# EAGLE board CT_schematic (EAGLE 7.6.0)

Size 100 x 80 mm. Coordinates in mm from the lower left corner, seen from the top.
Outline: 0,0 100,0 100,80 0,80 0,0
Copper layers (1*16): Top 0.035mm / dielectric 1.5mm / Bottom 0.035mm
Design rules "default": minimum track width 10mil, minimum drill 24mil, track to track 8mil, track to pad 8mil, pad to pad 8mil, via to via 8mil, smd to smd 8mil, copper to edge 40mil, drill to drill 8mil, minimum pad ring 10mil, minimum via ring 8mil, stop-mask expansion 4mil, vias tented up to drill 0mil, thermal gap 10mil

## Footprints (pad centres in the part's own frame; a part is rotated, then mirrored left to right if it is on the bottom)
C0603 = smd 0.8 x 0.8: 1 -0.762,0; 2 0.762,0
C0402 = smd 0.5 x 0.5: 1 -0.508,0; 2 0.508,0
C0805 = smd 1.2 x 1.3: 1 -1.016,0; 2 1.016,0
C1210 = smd 1.2 x 2.5: 1 -1.524,0; 2 1.524,0
C1206 = smd 1.3 x 1.6: 1 -1.524,0; 2 1.524,0
EXV-9H = smd 3.505 x 1.676: 1 -2.857,0; 2 2.857,0
L0603 = smd 0.8 x 0.8: 1 -0.762,0; 2 0.762,0
R0603 = smd 0.8 x 0.8: 1 -0.762,0; 2 0.762,0
DR1040 = smd 1.6 x 3.2: 1 -4.458,0; 2 4.458,0
PJ-037B_PACKAGE = drill 3.7 square: 1 12,0 | drill 3.2 square: 2 6,0
UFBGA169 = smd 0.35 x 0.35: A1 -3.9,3.9; A2 -3.25,3.9; A3 -2.6,3.9; A4 -1.95,3.9; A5 -1.3,3.9; A6 -0.65,3.9; A7 0,3.9; A8 0.65,3.9; A9 1.3,3.9; A10 1.95,3.9; A11 2.6,3.9; A12 3.25,3.9; A13 3.9,3.9; B1 -3.9,3.25; B2 -3.25,3.25; B3 -2.6,3.25; B4 -1.95,3.25; B5 -1.3,3.25; B6 -0.65,3.25; B7 0,3.25; B8 0.65,3.25; B9 1.3,3.25; B10 1.95,3.25; B11 2.6,3.25; B12 3.25,3.25; B13 3.9,3.25; C1 -3.9,2.6; C2 -3.25,2.6; C3 -2.6,2.6; C4 -1.95,2.6; C5 -1.3,2.6; C6 -0.65,2.6; C7 0,2.6; C8 0.65,2.6; C9 1.3,2.6; C10 1.95,2.6; C11 2.6,2.6; C12 3.25,2.6; C13 3.9,2.6; D1 -3.9,1.95; D2 -3.25,1.95; D3 -2.6,1.95; D4 -1.95,1.95; D5 -1.3,1.95; D6 -0.65,1.95; D7 0,1.95; D8 0.65,1.95; D9 1.3,1.95; D10 1.95,1.95; D11 2.6,1.95; D12 3.25,1.95; D13 3.9,1.95; E1 -3.9,1.3; E2 -3.25,1.3; E3 -2.6,1.3; E4 -1.95,1.3; E5 -1.3,1.3; E6 -0.65,1.3; E7 0,1.3; E8 0.65,1.3; E9 1.3,1.3; E10 1.95,1.3; E11 2.6,1.3; E12 3.25,1.3; E13 3.9,1.3; F1 -3.9,0.65; F2 -3.25,0.65; F3 -2.6,0.65; F4 -1.95,0.65; F5 -1.3,0.65; F6 -0.65,0.65; F7 0,0.65; F8 0.65,0.65; F9 1.3,0.65; F10 1.95,0.65; F11 2.6,0.65; F12 3.25,0.65; F13 3.9,0.65; G1 -3.9,0; G2 -3.25,0; G3 -2.6,0; G4 -1.95,0; G5 -1.3,0; G6 -0.65,0; G7 0,0; G8 0.65,0; G9 1.3,0; G10 1.95,0; G11 2.6,0; G12 3.25,0; G13 3.9,0; H1 -3.9,-0.65; H2 -3.25,-0.65; H3 -2.6,-0.65; H4 -1.95,-0.65; H5 -1.3,-0.65; H6 -0.65,-0.65; H7 0,-0.65; H8 0.65,-0.65; H9 1.3,-0.65; H10 1.95,-0.65; H11 2.6,-0.65; H12 3.25,-0.65; H13 3.9,-0.65; J1 -3.9,-1.3; J2 -3.25,-1.3; J3 -2.6,-1.3; J4 -1.95,-1.3; J5 -1.3,-1.3; J6 -0.65,-1.3; J7 0,-1.3; J8 0.65,-1.3; J9 1.3,-1.3; J10 1.95,-1.3; J11 2.6,-1.3; J12 3.25,-1.3; J13 3.9,-1.3; K1 -3.9,-1.95; K2 -3.25,-1.95; K3 -2.6,-1.95; K4 -1.95,-1.95; K5 -1.3,-1.95; K6 -0.65,-1.95; K7 0,-1.95; K8 0.65,-1.95; K9 1.3,-1.95; K10 1.95,-1.95; K11 2.6,-1.95; K12 3.25,-1.95; K13 3.9,-1.95; L1 -3.9,-2.6; L2 -3.25,-2.6; L3 -2.6,-2.6; L4 -1.95,-2.6; L5 -1.3,-2.6; L6 -0.65,-2.6; L7 0,-2.6; L8 0.65,-2.6; L9 1.3,-2.6; L10 1.95,-2.6; L11 2.6,-2.6; L12 3.25,-2.6; L13 3.9,-2.6; M1 -3.9,-3.25; M2 -3.25,-3.25; M3 -2.6,-3.25; M4 -1.95,-3.25; M5 -1.3,-3.25; M6 -0.65,-3.25; M7 0,-3.25; M8 0.65,-3.25; M9 1.3,-3.25; M10 1.95,-3.25; M11 2.6,-3.25; M12 3.25,-3.25; M13 3.9,-3.25; N1 -3.9,-3.9; N2 -3.25,-3.9; N3 -2.6,-3.9; N4 -1.95,-3.9; N5 -1.3,-3.9; N6 -0.65,-3.9; N7 0,-3.9; N8 0.65,-3.9; N9 1.3,-3.9; N10 1.95,-3.9; N11 2.6,-3.9; N12 3.25,-3.9; N13 3.9,-3.9
SOT-23-6 = smd 1.1 x 0.6: 1 -1.4,0.95; 2 -1.4,0; 3 -1.4,-0.95; 4 1.4,-0.95; 5 1.4,0; 6 1.4,0.95
QFN-32 = smd 0.6 x 0.3: 1 -2.3,1.75; 2 -2.3,1.25; 3 -2.3,0.75; 4 -2.3,0.25; 5 -2.3,-0.25; 6 -2.3,-0.75; 7 -2.3,-1.25; 8 -2.3,-1.75; 17 2.3,-1.75; 18 2.3,-1.25; 19 2.3,-0.75; 20 2.3,-0.25; 21 2.3,0.25; 22 2.3,0.75; 23 2.3,1.25; 24 2.3,1.75 | smd 0.3 x 0.6: 9 -1.75,-2.3; 10 -1.25,-2.3; 11 -0.75,-2.3; 12 -0.25,-2.3; 13 0.25,-2.3; 14 0.75,-2.3; 15 1.25,-2.3; 16 1.75,-2.3; 25 1.75,2.3; 26 1.25,2.3; 27 0.75,2.3; 28 0.25,2.3; 29 -0.25,2.3; 30 -0.75,2.3; 31 -1.25,2.3; 32 -1.75,2.3 | smd 3.2 x 3.2: EXP 0,0
7498011122R = smd 0.71 x 2.29: 1 -3.545,-3.18; 2 -2.525,-3.18; 3 -1.505,-3.18; 4 -0.485,-3.18; 5 0.535,-3.18; 6 1.555,-3.18; 8 3.595,-3.18; 9 5.635,-3.18; 10 6.655,-3.18; 11 -6.605,-3.18; 12 -5.585,-3.18 | smd 1.4 x 2.54: 13 -8.51,10.2; 14 8.51,10.2 | hole 1.4: -3.5,0; 3.5,0
MOLEX_47219-2001 = smd 0.8 x 1.5: 1 3.2,-2.1; 2 2.1,-2.1; 3 1,-2.1; 4 -0.1,-2.1; 5 -1.2,-2.1; 6 -2.3,-2.1; 7 -3.4,-2.1; 8 -4.5,-2.1 | smd 1.5 x 2.05: G1 6.875,-4.7; G2 6.875,3.6; G3 -6.875,3.6; G4 -6.875,-4.7
USB-A-H = drill 0.914: 1 2.718,3.493; 2 2.718,1.003; 3 2.718,-1.003; 4 2.718,-3.493 | drill 2.311: 5 0,-6.566; 6 0,6.566
SOT143B = smd 1 x 0.7: 1 -0.75,-1 | smd 0.6 x 0.7: 2 0.95,-1; 3 0.95,1; 4 -0.95,1
ABLS-25.000MHZ-B2F-T = smd 5.6 x 2.8: 1 -3.81,0; 2 5.69,0
ASEK = smd 1.4 x 1: 1 -1.1,-0.8; 2 1.1,-0.8; 3 1.1,0.8; 4 -1.1,0.8
ASFL1 = smd 1.7 x 1.5: 1 -1.27,-1.1; 2 1.27,-1.1; 3 1.27,1.1; 4 -1.27,1.1
WSON-8 = smd 0.3 x 0.6: 1 -0.75,0; 2 0.05,0; 3 0.85,0; 4 1.65,0; 5 1.65,3.8; 6 0.85,3.8; 7 0.05,3.8; 8 -0.75,3.8 | smd 3 x 2.6: PAD 0.45,1.9
HTSSOP14 = smd 1.676 x 0.356: 1 -2.8,1.95; 2 -2.8,1.3; 3 -2.8,0.65; 4 -2.8,0; 5 -2.8,-0.65; 6 -2.8,-1.3; 7 -2.8,-1.95; 8 2.8,-1.95; 9 2.8,-1.3; 10 2.8,-0.65; 11 2.8,0; 12 2.8,0.65; 13 2.8,1.3; 14 2.8,1.95 | smd 3 x 5: 15 0,0 | drill 0.4 pad 0.45: P$1 -0.75,1.5; P$2 0.75,1.5; P$3 -0.75,0; P$4 0.8,0; P$5 -0.75,-1.5; P$6 0.9,-1.5
SON-6 = smd 0.55 x 0.3: 1 -0.355,0.5 | smd 0.52 x 0.3: 2 -0.37,0; 3 -0.37,-0.5; 4 0.37,-0.5; 5 0.37,0; 6 0.37,0.5
SW_4-1437565-2 = smd 1.4 x 2.1: 1 -2.23,4.55; 2 -2.23,-4.55; 3 2.23,4.55; 4 2.23,-4.55
LGM67K-G1J2-24-Z = smd 0.8 x 1.4: A -2,0; C 0,0
NC7SZ125M5X = smd 1.3 x 0.7: 1 -1.3,0.95; 2 -1.3,0; 3 -1.3,-0.95; 4 1.3,-0.95; 5 1.3,0.95
DUMMY_PACKAGE_243 = drill 0.3: 1 0,-1; 2 1.5,-1; 3 3,-1

## Placement (x,y rotation side)
C1  1e-06  [C0603]  -59.69,80.01 0 top  (outside the outline)
C2  1e-07  [C0603]  -63.5,80.01 0 top  (outside the outline)
C3  1e-07  [C0603]  -67.31,80.01 0 top  (outside the outline)
C4  1e-07  [C0603]  -71.12,80.01 0 top  (outside the outline)
C5  1e-07  [C0603]  -74.93,80.01 0 top  (outside the outline)
C6  1e-07  [C0603]  -78.74,80.01 0 top  (outside the outline)
C7  1e-07  [C0603]  -82.55,80.01 0 top  (outside the outline)
C8  1e-07  [C0603]  -15.24,85.09 0 top  (outside the outline)
C9  1e-07  [C0603]  -19.05,85.09 0 top  (outside the outline)
C10  1e-07  [C0603]  -22.86,85.09 0 top  (outside the outline)
C11  1e-07  [C0603]  -26.67,85.09 0 top  (outside the outline)
C12  1e-07  [C0603]  -30.48,85.09 0 top  (outside the outline)
C13  1e-07  [C0603]  -34.29,85.09 0 top  (outside the outline)
C14  1e-07  [C0603]  -38.1,85.09 0 top  (outside the outline)
C15  1e-07  [C0603]  -41.91,85.09 0 top  (outside the outline)
C16  1e-07  [C0603]  -45.72,85.09 0 top  (outside the outline)
C17  4.7e-06  [C0603]  -44.45,80.01 0 top  (outside the outline)
C18  1e-08  [C0603]  -49.53,85.09 0 top  (outside the outline)
C19  1e-06  [C0603]  -53.34,85.09 0 top  (outside the outline)
C20  2.2e-06  [C0603]  -48.26,80.01 0 top  (outside the outline)
C21  2.2e-06  [C0603]  -52.07,80.01 0 top  (outside the outline)
C22  1e-11  [C0402]  -81.28,90.17 0 top  (outside the outline)
C23  1e-11  [C0402]  -85.09,90.17 0 top  (outside the outline)
C24  2.2e-08  [C0402]  -73.66,90.17 0 top  (outside the outline)
C25  1e-06  [C0603]  -57.15,85.09 0 top  (outside the outline)
C26  1e-06  [C0603]  -60.96,85.09 0 top  (outside the outline)
C27  4.7e-10  [C0603]  -55.88,80.01 0 top  (outside the outline)
C28  1e-06  [C0603]  -64.77,85.09 0 top  (outside the outline)
C29  1e-07  [C0402]  -15.24,95.25 0 top  (outside the outline)
C30  1e-05  [C0805]  -15.24,69.85 0 top  (outside the outline)
C31  1e-08  [C0402]  -19.05,95.25 0 top  (outside the outline)
C32  1e-08  [C0402]  -22.86,95.25 0 top  (outside the outline)
C33  1e-08  [C0402]  -26.67,95.25 0 top  (outside the outline)
C34  1e-05  [C1210]  -29.21,63.5 0 top  (outside the outline)
C35  1e-05  [C0805]  -20.32,69.85 0 top  (outside the outline)
C36  1e-06  [C0603]  -68.58,85.09 0 top  (outside the outline)
C37  3.3e-09  [C0402]  -77.47,90.17 0 top  (outside the outline)
C38  1e-07  [C0402]  -30.48,95.25 0 top  (outside the outline)
C39  2.2e-05  [C1210]  -35.56,63.5 0 top  (outside the outline)
C40  2.2e-05  [C1210]  -41.91,63.5 0 top  (outside the outline)
C41  1e-05  [C1206]  -60.96,63.5 0 top  (outside the outline)
C42  1e-05  [C1206]  -67.31,63.5 0 top  (outside the outline)
C43  1e-08  [C0402]  -34.29,95.25 0 top  (outside the outline)
C44  1e-05  [C1210]  -48.26,63.5 0 top  (outside the outline)
C45  1e-05  [C1210]  -54.61,63.5 0 top  (outside the outline)
C46  1e-07  [C0402]  -38.1,95.25 0 top  (outside the outline)
C47  0.0001  [EXV-9H]  -38.1,55.88 0 top  (outside the outline)
C48  0.0001  [EXV-9H]  -49.53,55.88 0 top  (outside the outline)
C49  1e-08  [C0402]  -41.91,95.25 0 top  (outside the outline)
C50  1e-08  [C0402]  -45.72,95.25 0 top  (outside the outline)
F1  240.0  [L0603]  -72.39,85.09 0 top  (outside the outline)
I1  97.0  [R0603]  -76.2,85.09 0 top  (outside the outline)
I5  3.8e-06  [DR1040]  -54.61,34.29 0 top  (outside the outline)
J1  PJ-037B  [PJ-037B_PACKAGE]  -27.94,35.56 0 top  (outside the outline)
R2  1000.0  [R0603]  -80.01,85.09 0 top  (outside the outline)
R7  4700.0  [R0603]  -83.82,85.09 0 top  (outside the outline)
R8  4700.0  [R0603]  -15.24,90.17 0 top  (outside the outline)
R13  47000.0  [R0603]  -85.09,69.85 0 top  (outside the outline)
R14  10000.0  [R0603]  -15.24,74.93 0 top  (outside the outline)
R15  10000.0  [R0603]  -20.32,74.93 0 top  (outside the outline)
R16  10000.0  [R0603]  -25.4,74.93 0 top  (outside the outline)
R17  10000.0  [R0603]  -30.48,74.93 0 top  (outside the outline)
R18  1270.0  [R0603]  -19.05,90.17 0 top  (outside the outline)
R19  10000.0  [R0603]  -35.56,74.93 0 top  (outside the outline)
R20  10000.0  [R0603]  -40.64,74.93 0 top  (outside the outline)
R21  0.1  [R0603]  -22.86,90.17 0 top  (outside the outline)
R22  0.1  [R0603]  -26.67,90.17 0 top  (outside the outline)
R23  200.0  [R0603]  -30.48,90.17 0 top  (outside the outline)
R24  200.0  [R0603]  -34.29,90.17 0 top  (outside the outline)
R25  12100.0  [R0603]  -45.72,74.93 0 top  (outside the outline)
R26  49.9  [R0603]  -38.1,90.17 0 top  (outside the outline)
R27  49.9  [R0603]  -41.91,90.17 0 top  (outside the outline)
R28  49.9  [R0603]  -45.72,90.17 0 top  (outside the outline)
R29  10000.0  [R0603]  -50.8,74.93 0 top  (outside the outline)
R30  49.9  [R0603]  -49.53,90.17 0 top  (outside the outline)
R31  10000.0  [R0603]  -55.88,74.93 0 top  (outside the outline)
R32  10000.0  [R0603]  -60.96,74.93 0 top  (outside the outline)
R33  10000.0  [R0603]  -66.04,74.93 0 top  (outside the outline)
R34  10000.0  [R0603]  -71.12,74.93 0 top  (outside the outline)
R35  10000.0  [R0603]  -76.2,74.93 0 top  (outside the outline)
R36  10000.0  [R0603]  -81.28,74.93 0 top  (outside the outline)
R37  10000.0  [R0603]  -15.24,80.01 0 top  (outside the outline)
R38  10000.0  [R0603]  -20.32,80.01 0 top  (outside the outline)
R39  10000.0  [R0603]  -25.4,80.01 0 top  (outside the outline)
R40  100000.0  [R0603]  -34.29,69.85 0 top  (outside the outline)
R41  100000.0  [R0603]  -39.37,69.85 0 top  (outside the outline)
R42  100000.0  [R0603]  -44.45,69.85 0 top  (outside the outline)
R43  100000.0  [R0603]  -49.53,69.85 0 top  (outside the outline)
R44  100000.0  [R0603]  -54.61,69.85 0 top  (outside the outline)
R45  100000.0  [R0603]  -59.69,69.85 0 top  (outside the outline)
R46  100000.0  [R0603]  -64.77,69.85 0 top  (outside the outline)
R47  200.0  [R0603]  -53.34,90.17 0 top  (outside the outline)
R48  1000.0  [R0603]  -57.15,90.17 0 top  (outside the outline)
R49  71007.101651032  [R0603]  -29.21,69.85 0 top  (outside the outline)
R50  22000.0  [R0603]  -30.48,80.01 0 top  (outside the outline)
R51  100000.0  [R0603]  -69.85,69.85 0 top  (outside the outline)
R52  3900.0  [R0603]  -60.96,90.17 0 top  (outside the outline)
R53  1000.0  [R0603]  -64.77,90.17 0 top  (outside the outline)
R54  10000.0  [R0603]  -35.56,80.01 0 top  (outside the outline)
R55  10000.0  [R0603]  -40.64,80.01 0 top  (outside the outline)
R56  9100.0  [R0603]  -68.58,90.17 0 top  (outside the outline)
R57  680000.0  [R0603]  -74.93,69.85 0 top  (outside the outline)
R58  120000.0  [R0603]  -80.01,69.85 0 top  (outside the outline)
U1  STM32F429AGH6  [UFBGA169]  -80.01,7.62 0 top  (outside the outline)
U2  MAX4995AAUT+T  [SOT-23-6]  -72.39,62.23 0 top  (outside the outline)
U3  LAN8710AI-EZK  [QFN-32]  -69.85,34.29 0 top  (outside the outline)
U4  7498011122R  [7498011122R]  -22.86,7.62 0 top  (outside the outline)
U5  0472192001  [MOLEX_47219-2001]  -59.69,8.89 0 top  (outside the outline)
U6  61400416021  [USB-A-H]  -39.37,8.89 0 top  (outside the outline)
U7  prtr5v0u2ax  [SOT143B]  -58.42,95.25 0 top  (outside the outline)
U8  ABLS-25.000MHZ-B2F-T  [ABLS-25.000MHZ-B2F-T]  -68.58,55.88 0 top  (outside the outline)
U9  ASEK-32.768KHz-ECST  [ASEK]  -29.21,55.88 0 top  (outside the outline)
U10  ASFL1-50MHZ-NCS  [ASFL1]  -67.31,46.99 0 top  (outside the outline)
U11  LP3878SDX-ADJ/NOPB  [WSON-8]  -30.48,45.72 0 top  (outside the outline)
U12  TPS54425PWP  [HTSSOP14]  -80.01,55.88 0 top  (outside the outline)
U13  LP3878SDX-ADJ/NOPB  [WSON-8]  -50.8,45.72 0 top  (outside the outline)
U14  TPS3895ADRYR  [SON-6]  -67.31,93.98 0 top  (outside the outline)
U15  4-1437565-2  [SW_4-1437565-2]  -44.45,34.29 0 top  (outside the outline)
U16  Q65110A2395  [LGM67K-G1J2-24-Z]  -17.78,63.5 0 top  (outside the outline)
U17  nc7sz125m5x  [NC7SZ125M5X]  -77.47,62.23 0 top  (outside the outline)
U18  nc7sz125m5x  [NC7SZ125M5X]  -83.82,62.23 0 top  (outside the outline)
U19  Dummy  [DUMMY_PACKAGE_243]  -64.77,95.25 0 top  (outside the outline)

## Library data of the parts
C1-C50 F1 I1 I5 J1 R2 R7 R8 R13-R58 U1-U19 = circuit_tree

## Nets
CLK_CRYSTAL_U1_G1: C22.1 U1.G1 U8.1
CLK_CRYSTAL_U1_G2: C23.1 U1.G2 U8.2
CLK_U1_E1: U1.E1 U9.3
CLK_U1_K1: U1.K1 U10.3
GND: C1.2 C2.2 C3.2 C4.2 C5.2 C6.2 C7.2 C8.2 C9.2 C10.2 C11.2 C12.2 C13.2 C14.2 C15.2 C16.2 C17.2 C18.2 C19.2 C20.2 C21.2 C22.2 C23.2 C24.2 C25.2 C26.2 C27.2 C28.2 C29.2 C30.2 C31.2 C32.2 C33.2 C34.2 C35.2 C36.2 C37.2 C39.2 C40.2 C41.2 C42.2 C43.2 C44.2 C45.2 C46.2 C47.2 C48.2 C49.2 C50.2 J1.2 R2.2 R13.2 R17.2 R18.2 R20.2 R21.2 R22.2 R23.2 R25.2 R31.2 R38.2 R39.2 R48.2 R50.2 R53.2 R56.2 R58.2 U1.D7 U1.D11 U1.E7 U1.F5 U1.F6 U1.G7 U1.G9 U1.J1 U1.J2 U1.J6 U1.J7 U1.J10 U2.2 U3.24 U3.25 U3.EXP U5.6 U5.G1 U5.G2 U5.G3 U5.G4 U6.4 U6.5 U6.6 U7.1 U9.2 U10.2 U11.3 U11.PAD U12.5 U12.8 U12.9 U12.15 U13.3 U13.PAD U14.2 U16.C U17.1 U17.3 U18.1 U18.3 U19.1
NET_U1_A5: R15.1 U1.A5
NET_U1_C3: R14.1 U1.C3
NET_U1_D12: C21.1 U1.D12
NET_U1_E9: R18.1 U1.E9
NET_U1_H2: R8.1 U1.H2 U18.4
NET_U1_H5: U3.17
NET_U1_J4: C18.1 C19.1 F1.1 U1.J3 U1.J4
NET_U1_K2: U3.16
NET_U1_L5: R16.1 U1.L5
NET_U1_M1: R17.1 U1.M1
NET_U1_N9: C20.1 U1.N9
NET_U1_N10: U16.A
NET_U1_N11: U15.3 U15.4
NET_U2_3: R13.1 U2.3
NET_U3_1: C25.1 I1.1 R26.2 R27.2 R28.2 R30.2 R33.2 U3.1 U3.27 U4.2 U4.9
NET_U3_3: R33.1 U3.3
NET_U3_7: R38.1 U3.7
NET_U3_8: R39.1 U3.8
NET_U3_9: R31.1 R32.1 U3.9
NET_U3_13: R37.1 U3.13
NET_U3_18: R29.1 U3.18
NET_U3_19: R7.1 U3.19 U17.4
NET_U3_32: R25.1 U3.32
NET_U4_1: R26.1 U3.29 U4.1
NET_U4_3: R24.2 R27.1 U3.28 U4.3
NET_U4_4: R28.1 U3.31 U4.4
NET_U4_5: C24.1 U4.2 U4.5
NET_U4_6: R30.1 U3.30 U4.6
NET_U4_8: R22.1 U4.8
NET_U4_10: R24.1 U4.10
NET_U4_11: U3.2 U4.11
NET_U4_12: R23.1 U4.12
NET_U4_13: R21.1 U4.13 U4.14
NET_U11_1: C33.1 U11.1
NET_U11_6: R47.2 R48.1 U11.6
NET_U11_8: R46.1 U11.8
NET_U12_2: R49.2 R50.1 U12.2
NET_U12_3: C36.1 U12.3
NET_U12_4: C37.1 U12.4
NET_U12_10: C38.1 I5.1 U12.10 U12.11
NET_U12_12: C38.2 U12.12
NET_U13_1: C43.1 U13.1
NET_U13_6: R52.2 R53.1 U13.6
NET_U13_8: R51.1 U13.8
NET_U14_1: R55.1 R56.1 U14.1
NET_U14_3: R57.2 R58.1 U14.3
NET_U14_4: R54.1 U14.4 U17.2 U18.2
NET_U15_1: R2.1 U15.1 U15.2
PROC_ETH_CRS_DV: R36.1 U3.15
PROC_ETH_RXD0: R34.1 U3.11
PROC_ETH_RXD1: R35.1 U3.10
PROC_ETH_TX_EN: U3.21
PROC_ETH_TXD0: U3.22
PROC_ETH_TXD1: U3.23
PROC_GPIO_TO_U1_USB_FAULT: R19.1 U1.A3 U2.6
PROC_GPIO_TO_U1_VBUS_EN: R20.1 U1.A2 U2.4
PROC_SDIO_CK: R41.1 U1.A10 U5.5
PROC_SDIO_CMD: R40.1 U1.B9 U5.3
PROC_SDIO_D0: R42.1 U1.F11 U5.7
PROC_SDIO_D1: R43.1 U1.F12 U5.8
PROC_SDIO_D2: R44.1 U1.C10 U5.1
PROC_SDIO_D3: R45.1 U1.B10 U5.2
PROC_TIM1_CH1: U1.E13 U19.2
PROC_TIM1_CH2N: U1.L8 U19.3
PROC_USB_OTG_FS_DM: U1.E10 U6.2 U7.3
PROC_USB_OTG_FS_DP: U1.E11 U6.3 U7.2
PROC_USB_OTG_FS_VBUS: U1.E8 U2.1 U6.1 U7.4
VCC_S1_14V5: C34.1 C41.1 C42.1 C44.1 C47.1 C48.1 J1.1 R46.2 R51.2 U11.4 U12.7 U12.13 U12.14 U13.4
VCC_TIER1_1V2: C26.1 C27.1 C35.1 R47.1 U3.6 U11.5
VCC_TIER1_3V3: C1.1 C2.1 C3.1 C4.1 C5.1 C6.1 C7.1 C8.1 C9.1 C10.1 C11.1 C12.1 C13.1 C14.1 C15.1 C16.1 C17.1 C28.1 C29.1 C30.1 C31.1 C32.1 C39.1 C40.1 C46.1 C49.1 C50.1 F1.2 I1.2 I5.2 R7.2 R8.2 R14.2 R15.2 R16.2 R19.2 R29.2 R32.2 R34.2 R35.2 R36.2 R37.2 R40.2 R41.2 R42.2 R43.2 R44.2 R45.2 R49.1 R54.2 R55.2 R57.1 U1.D3 U1.D6 U1.D10 U1.E5 U1.E6 U1.F4 U1.F7 U1.F8 U1.G8 U1.G10 U1.H4 U1.H8 U1.J11 U1.K6 U1.L6 U3.12 U5.4 U9.4 U10.4 U12.1 U14.6 U17.5 U18.5
VCC_TIER1_5V0: C45.1 R52.1 U2.5 U13.5

## Tracks (layer width: path | path; a pad name or v marks a point on that pad's centre or on a via)
CLK_CRYSTAL_U1_G1  (2 unrouted)
CLK_CRYSTAL_U1_G2  (2 unrouted)
CLK_U1_E1  (1 unrouted)
CLK_U1_K1  (1 unrouted)
GND  (108 unrouted)
NET_U1_A5  (1 unrouted)
NET_U1_C3  (1 unrouted)
NET_U1_D12  (1 unrouted)
NET_U1_E9  (1 unrouted)
NET_U1_H2  (2 unrouted)
NET_U1_J4  (4 unrouted)
NET_U1_L5  (1 unrouted)
NET_U1_M1  (1 unrouted)
NET_U1_N9  (1 unrouted)
NET_U1_N11  (1 unrouted)
NET_U2_3  (1 unrouted)
NET_U3_1  (10 unrouted)
NET_U3_3  (1 unrouted)
NET_U3_7  (1 unrouted)
NET_U3_8  (1 unrouted)
NET_U3_9  (2 unrouted)
NET_U3_13  (1 unrouted)
NET_U3_18  (1 unrouted)
NET_U3_19  (2 unrouted)
NET_U3_32  (1 unrouted)
NET_U4_1  (2 unrouted)
NET_U4_3  (3 unrouted)
NET_U4_4  (2 unrouted)
NET_U4_5  (2 unrouted)
NET_U4_6  (2 unrouted)
NET_U4_8  (1 unrouted)
NET_U4_10  (1 unrouted)
NET_U4_11  (1 unrouted)
NET_U4_12  (1 unrouted)
NET_U4_13  (2 unrouted)
NET_U11_1  (1 unrouted)
NET_U11_6  (2 unrouted)
NET_U11_8  (1 unrouted)
NET_U12_2  (2 unrouted)
NET_U12_3  (1 unrouted)
NET_U12_4  (1 unrouted)
NET_U12_10  (3 unrouted)
NET_U12_12  (1 unrouted)
NET_U13_1  (1 unrouted)
NET_U13_6  (2 unrouted)
NET_U13_8  (1 unrouted)
NET_U14_1  (2 unrouted)
NET_U14_3  (2 unrouted)
NET_U14_4  (3 unrouted)
NET_U15_1  (2 unrouted)
PROC_ETH_CRS_DV  (1 unrouted)
PROC_ETH_RXD0  (1 unrouted)
PROC_ETH_RXD1  (1 unrouted)
PROC_GPIO_TO_U1_USB_FAULT  (2 unrouted)
PROC_GPIO_TO_U1_VBUS_EN  (2 unrouted)
PROC_SDIO_CK  (2 unrouted)
PROC_SDIO_CMD  (2 unrouted)
PROC_SDIO_D0  (2 unrouted)
PROC_SDIO_D1  (2 unrouted)
PROC_SDIO_D2  (2 unrouted)
PROC_SDIO_D3  (2 unrouted)
PROC_TIM1_CH1  (1 unrouted)
PROC_TIM1_CH2N  (1 unrouted)
PROC_USB_OTG_FS_DM  (2 unrouted)
PROC_USB_OTG_FS_DP  (2 unrouted)
PROC_USB_OTG_FS_VBUS  (3 unrouted)
VCC_S1_14V5  (13 unrouted)
VCC_TIER1_1V2  (5 unrouted)
VCC_TIER1_3V3  (74 unrouted)
VCC_TIER1_5V0  (3 unrouted)